# Altium PCB PCB1.PcbDoc (part 1 of 2)
Units mm, origin at the board's own origin, x right, y up, seen from the top; angles counter-clockwise.
Board outline 52.81 x 140.21 mm, 4 copper layers (Top Layer, Int1 (GND), Int2 (PWR), Bottom Layer), stack 1.566 mm thick; 98 components, 47 nets, 264 pads, 608 vias.
Unrouted connection lines stored in the file: 7.
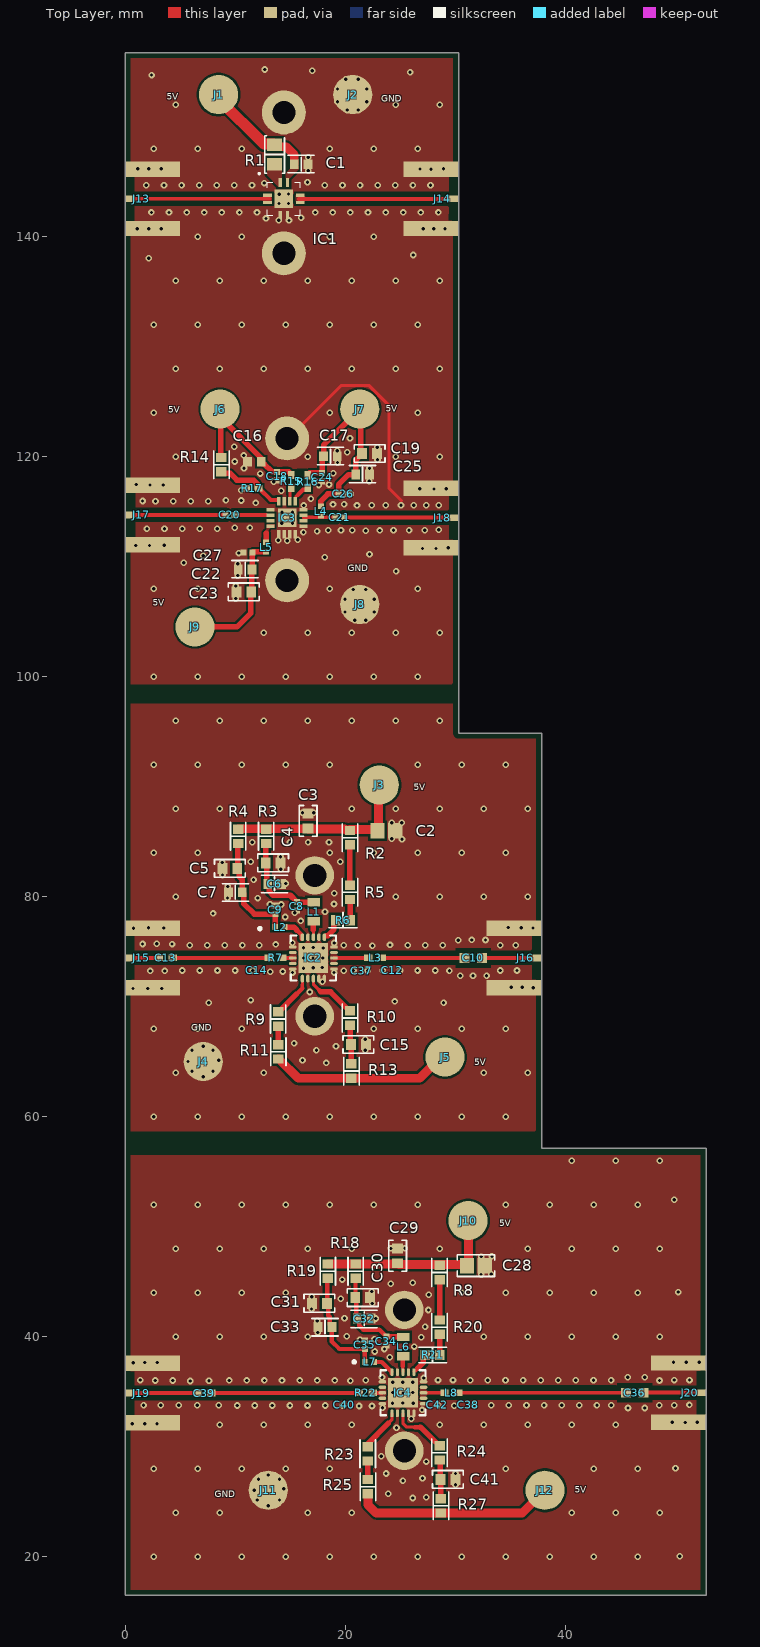
[diagram p0: Top Layer view]
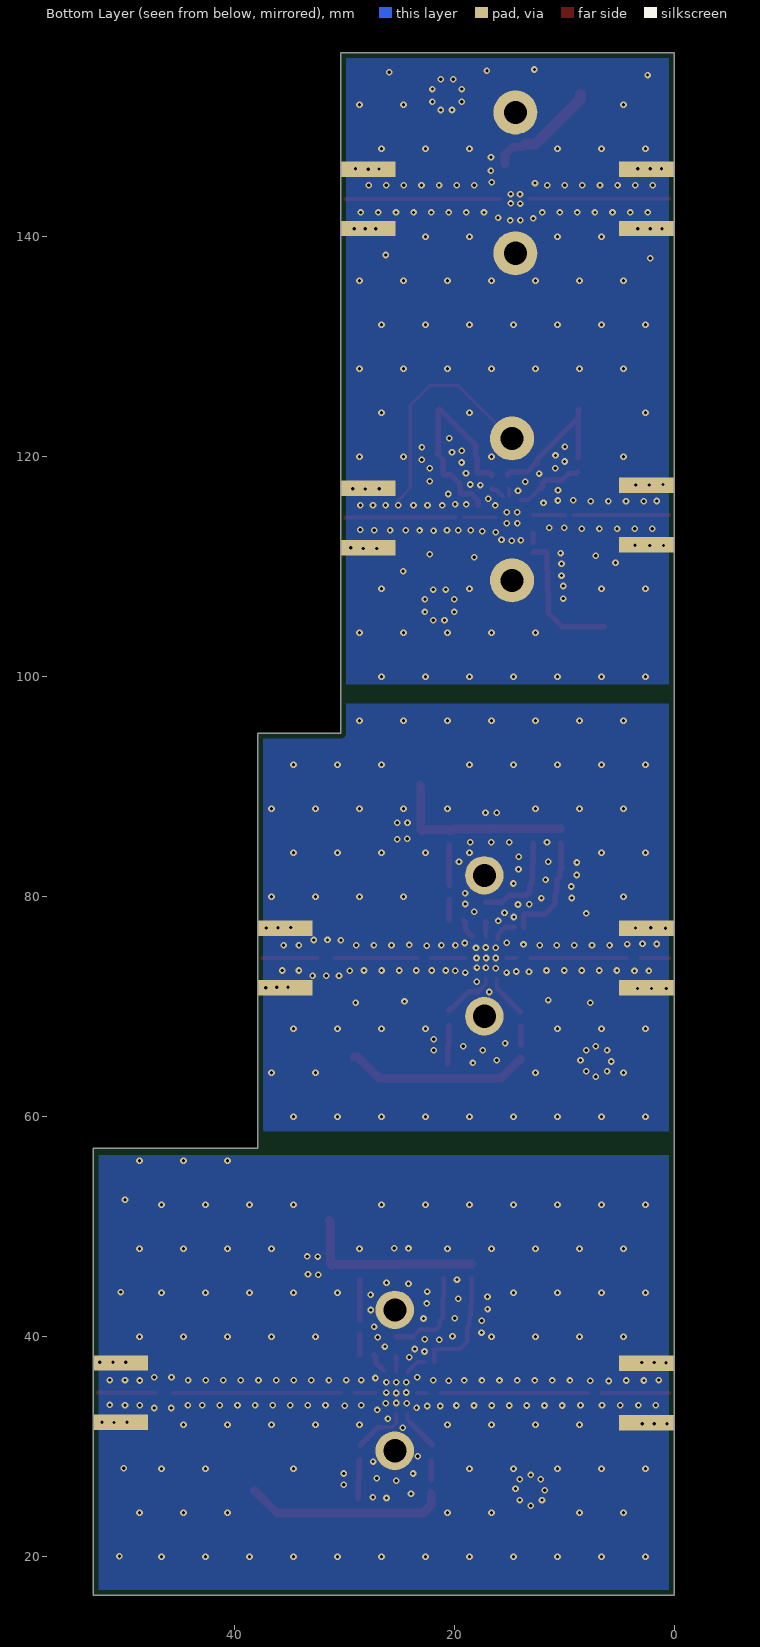
[diagram p1: Bottom Layer view, seen from below]
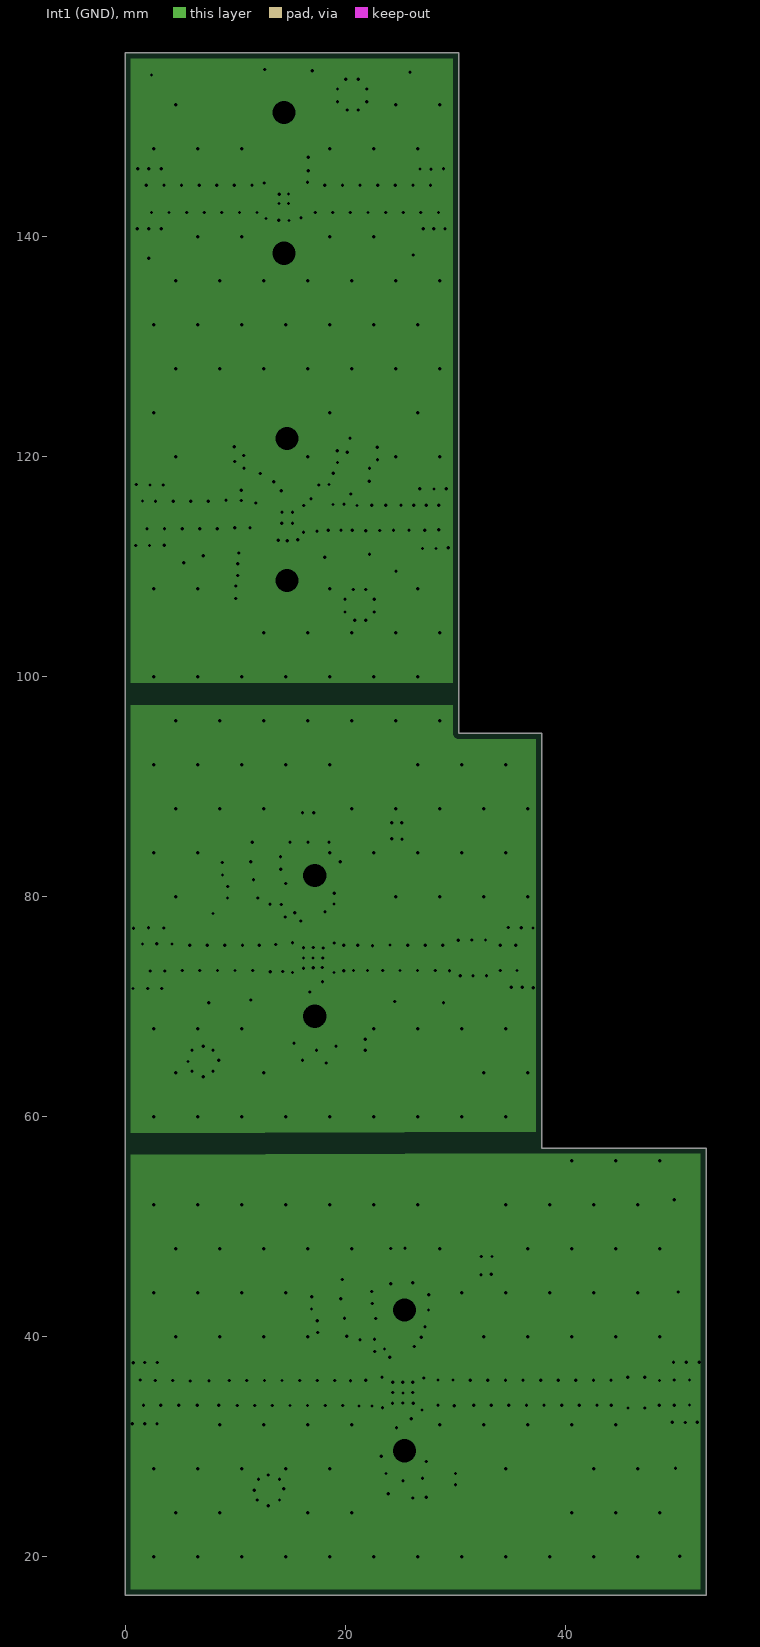
[diagram p2: Int1 (GND), clearances drawn from the general rule]
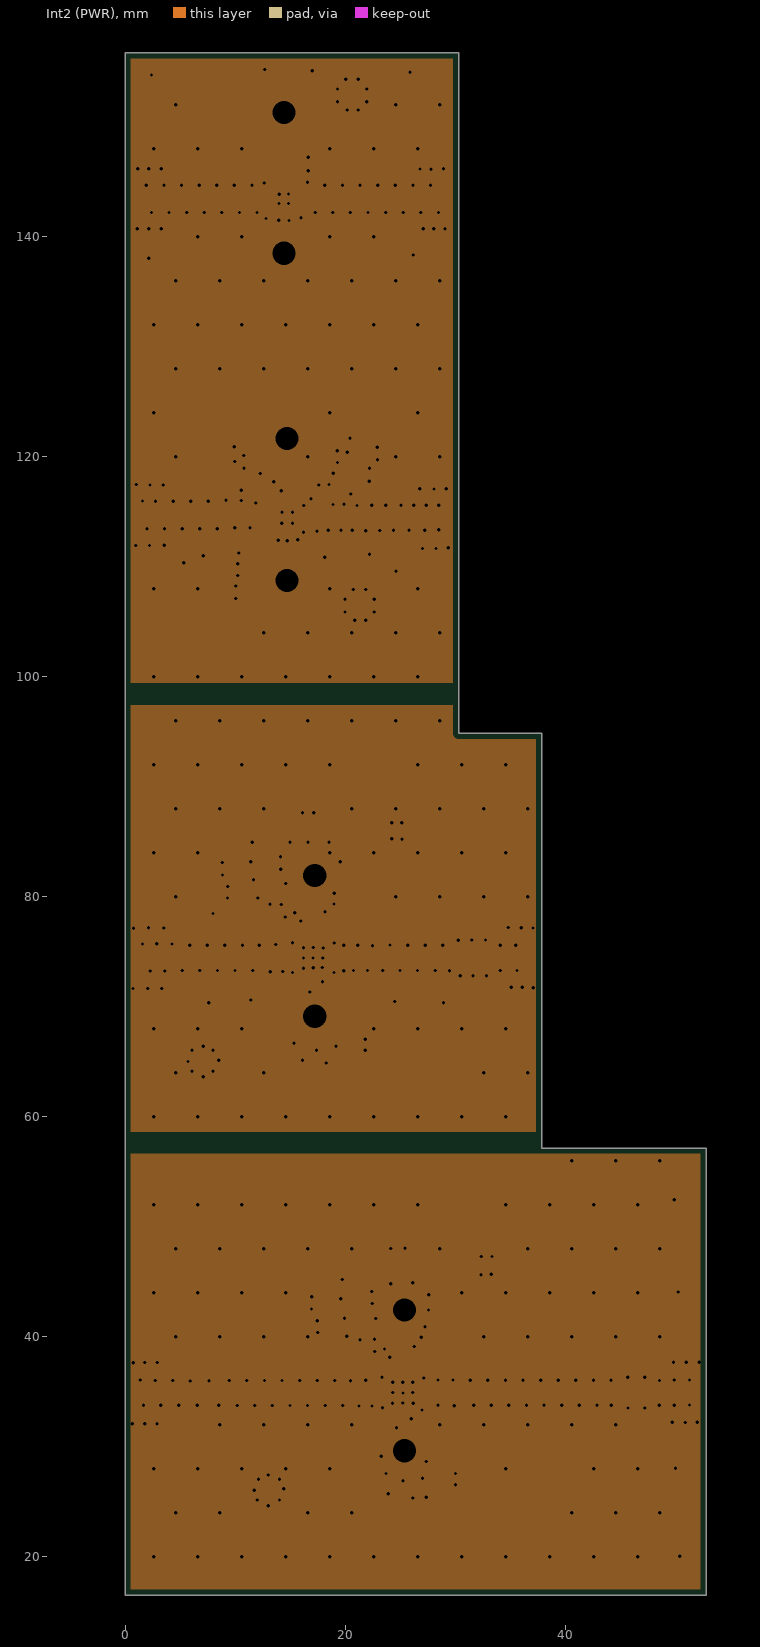
[diagram p3: Int2 (PWR), clearances drawn from the general rule]

## Layer stack, top to bottom
Top Solder: solder mask 0.0254, SM-001, Dk 4
Top Layer: signal copper 0.035
Dielectric 1: prepreg 0.203, PP-023, Dk 4.4
Int1 (GND): plane copper 0.03, net GND
Dielectric 3: core 1.03, Core-024, Dk 4.6
Int2 (PWR): plane copper 0.03, net GND
Dielectric 5: prepreg 0.203, PP-023, Dk 4.4
Bottom Layer: signal copper 0.035
Bottom Solder: solder mask 0.0254, SM-001, Dk 4

## Board outline
0,16.51 0,156.718 30.314,156.718 30.314,94.869 37.863,94.869 37.863,57.151 37.863,57.152 52.812,57.152 52.812,16.51

## Design rules (kind name [scope] priority, off if disabled: settings)
Clearance "Min Clearence_CPWG2" [InNet('GND') vs InNetClass('CPWG_2')] p1: gap=0.15 ignorepadtopadclearanceinfootprint=FALSE except(0.38: Arc-Fill Arc-Poly Arc-Region Track-Fill Track-Poly Track-Region)
Clearance "Minimum Clearence CPWG" [InNetClass('CPWG') vs InNet('GND')] p2: gap=0.2 ignorepadtopadclearanceinfootprint=FALSE except(0.5: Arc-Fill Arc-Poly Arc-Region Track-Fill Track-Poly Track-Region)
Clearance [All] p3: gap=0.2 ignorepadtopadclearanceinfootprint=FALSE except(0: Arc-Hole Track-Hole SMDPad-Hole THPad-Hole Via-Hole Fill-Hole Poly-Hole Region-Hole Text-Hole; 0.127: SMDPad-SMDPad; 0.254: Arc-Arc Arc-Track Arc-THPad Arc-Via Arc-Text Track-Track Track-THPad Track-Via Track-Text SMDPad-THPad SMDPad-Via SMDPad-Text THPad-Via THPad-Text Via-Via Via-Text Fill-Text Poly-Text Region-Text Text-Text; 0.5: THPad-THPad)
HoleSize [All] p1: absolutevalues=TRUE maxlimit=6.3 minlimit=0.15 maxpercent=80.000 minpercent=20.000
HoleToHoleClearance [All] p1: gap=0.5 allowstackedmicrovias=TRUE
MinimumSolderMaskSliver [All] p1: minsoldermaskwidth=0.1
PlaneClearance [All] p1: clearance=0.508
PlaneConnect [All] p1: planeconnectstyle=Direct reliefexpansion=0.508 reliefentries=4 reliefconductorwidth=0.254 reliefairgap=0.254
PolygonConnect [All] p1: connectstyle=Direct reliefconductorwidth=0.254 reliefentries=4 polygonreliefangle="90 Angle" airgapwidth=0.254
RoutingVias [All] p1: holewidth=0.3 width=0.6 viastyle="Through Hole" minholewidth=0.15 minwidth=0.25 maxholewidth=6.3 maxwidth=7
SilkToSolderMaskClearance [IsPad] p1: minsilkscreentomaskgap=0.15 clearancetoexposedcopper=TRUE
SolderMaskExpansion [All] p1: expansion=0.102 istentingtop=FALSE
Width CPWG_2 [InNetClass('CPWG_2')] p1: maxlimit=0.358 minlimit=0.358 preferedwidth=0.358 impedanceprofiledriven=TRUE impedanceprofileid={64A63989-DDA5-4355-8757-AC947321AC09} impedanceprofilevalue=50.000000 minimp=50.000000 maximp=50.000000 favimp=50.000000
Width CPWG [InNetClass('CPWG')] p2: maxlimit=0.358 minlimit=0.358 preferedwidth=0.358 impedanceprofiledriven=TRUE impedanceprofileid={64A63989-DDA5-4355-8757-AC947321AC09} impedanceprofilevalue=50.000000 minimp=50.000000 maximp=50.000000 favimp=50.000000
Width [All] p3: maxlimit=2 minlimit=0.2 preferedwidth=0.3 minimp=50.000000 maximp=50.000000 favimp=50.000000
24 further rules are at their usual default settings.

## Classes and differential pairs
net class CPWG: NetC20_1 NetC20_2 NetC21_1 NetC21_2 NetIC1_1 NetIC1_5
net class CPWG_2: NetC10_1 NetC10_2 NetC11_2 NetC13_1 NetC13_2 NetC36_1 NetC36_2 NetC37_2 NetC39_1 NetC39_2 NetIC2_2 NetIC4_2
component class TQP9111_Sparam_opt: C2 C3 C4 C5 C6 C7 C8 C9 C10 C11 C12 C13 C14 C15 IC2 J3 J4 J5 L1 L2 L3 R2 R3 R4 R5 R6 R7 R10 R11 R13
component class TQP9111_Devboard_opt: C28 C29 C30 C31 C32 C33 C34 C35 C36 C38 C39 C40 C41 IC4 J10 J11 J12 L6 L7 L8 R8 R18 R19 R20 R21 R22 R23 R24 R25 R27
component class QPA9120: C16 C17 C18 C19 C20 C21 C22 C23 C24 C25 C26 C27 IC3 J6 J7 J8 J9 L4 L5 R14 R15 R16 R17
component class MNA6A: C1 IC1 J1 J2 R1

## Components (designator, comment, footprint, x,y, rotation, side; value= is the part's Value field where it differs from the comment)
C1 "1n" "CAP 0603_1608 RF" 16.003,146.581 r0 top value=1000pF
C2 "10u" "CAP 0805_2012"#1 23.75,86.002 r180 top value="10 µF"
C3 "100n" "CAP 0603_1608" 16.638,86.891 r270 top
C4 "100n" "CAP 0603_1608" 13.463,83.081 r180 top
C5 "100n" "CAP 0603_1608" 9.526,82.573 r180 top
C6 "100p" "CAP 0603_1608 RF" 13.59,81.176 r180 top value="100 pF"
C7 "100p" "CAP 0603_1608 RF" 10.034,80.414 r180 top value="100 pF"
C8 "4p7" "CAP 0402_1005 RF"#1 15.622,79.144 r90 top value="4.7 pF"
C9 "4p7" "CAP 0402_1005 RF"#1 13.665,78.81 r90 top value="4.7 pF"
C10 "100p" 0603_SPECIAL 30.844,74.44 r0 top value="100 pF"
C12 "1p5" 0402_special 24.309,73.34 r90 top value="1.5 pF"
C13 "4p7" 0402_SPECIAL_3 3.078,74.44 r0 top value="4.7 pF"
C14 "2p7" 0402_special 11.968,73.34 r90 top
C15 "100n" "CAP 0603_1608" 21.21,66.571 r0 top
C16 "100p" "CAP 0603_1608 RF" 11.752,119.544 r0 top value="100 pF"
C17 "100p" "CAP 0603_1608 RF" 18.67,120.038 r0 top value="100 pF"
C18 "4p7" "CAP 0402_1005 RF"#1 13.826,118.238 r90 top value="4.7 pF"
C19 "1u" "CAP 0603_1608" 22.226,120.292 r0 top
C20 "18p" "CAP 0402_1005 RF"#2 9.526,114.704 r0 top value="18 pF"
C21 "18p" "CAP 0402_1005 RF"#2 19.501,114.493 r0 top value="18 pF"
C22 "100p" "CAP 0603_1608 RF" 10.923,109.751 r0 top value="100 pF"
C23 "1u" "CAP 0603_1608" 10.796,107.719 r0 top
C24 "4p7" "CAP 0402_1005 RF"#1 17.908,118.133 r270 top value="4.7 pF"
C25 "100p" "CAP 0603_1608 RF" 21.591,118.387 r0 top value="100 pF"
C26 "4p7" "CAP 0402_1005 RF"#2 19.813,116.609 r0 top value="4.7 pF"
C27 "4p7" "CAP 0402_1005 RF"#1 11.177,111.275 r0 top value="4.7 pF"
C28 "10u" "CAP 0805_2012"#2 31.891,46.479 r180 top value="10 µF"
C29 "100n" "CAP 0603_1608" 24.779,47.368 r270 top
C30 "100n" "CAP 0603_1608" 21.604,43.558 r180 top
C31 "100n" "CAP 0603_1608" 17.667,43.05 r180 top
C32 "100p" "CAP 0603_1608 RF" 21.731,41.653 r180 top value="100 pF"
C33 "100p" "CAP 0603_1608 RF" 18.175,40.891 r180 top value="100 pF"
C34 "4p7" "CAP 0402_1005 RF"#1 23.763,39.621 r90 top value="4.7 pF"
C35 "4p7" "CAP 0402_1005 RF"#1 21.805,39.287 r90 top value="4.7 pF"
C36 "100p" 0603_SPECIAL 45.543,34.917 r0 top value="100 pF"
C37 "1p5" 0402_special 21.532,73.297 r90 top value="1.5 pF" (schematic designator C12)
C38 "1p6" 0402_special 31.193,33.817 r90 top value="1.6 pF"
C39 "4p7" 0402_SPECIAL_3 6.594,34.892 r0 top value="4.7 pF"
C40 "2p2" 0402_special 19.916,33.807 r90 top value="2.2 pF"
C41 "100n" "CAP 0603_1608" 29.351,27.048 r0 top
C42 "1p6" 0402_special 28.376,33.817 r90 top value="1.6 pF" (schematic designator C38)
IC1 "MNA-6A+" MNA6A 14.434,143.44 r0 top
IC2 "TQP9111" FP-TQP9111-MFG 17.12,74.44 r0 top
IC3 "QPA9120" QFN50P300X300X86-17N-D 14.733,114.44 r0 top
IC4 "TQP9111" FP-TQP9111-MFG 25.261,34.917 r0 top
J1 "Nail_Head" Nail_Head#1 23.242,154.963 r0 top
J2 "Nail_Head" Nail_Head#2 6.859,155.09 r0 top
J3 "Nail_Head" Nail_Head#3 23.114,90.17 r0 top
J4 "Nail_Head" Nail_Head#3 7.112,65.024 r0 top
J5 "Nail_Head" Nail_Head#3 29.084,65.428 r0 top
J6 "Nail_Head" Nail_Head#3 8.636,124.333 r0 top
J7 "Nail_Head" Nail_Head#4 21.336,124.206 r0 top
J8 "Nail_Head" Nail_Head#3 21.336,106.567 r0 top
J9 "Nail_Head" Nail_Head#3 6.35,104.521 r0 top
J10 "Nail_Head" Nail_Head#3 31.184,50.564 r0 top
J11 "Nail_Head" Nail_Head#4 13.023,25.926 r0 top
J12 "Nail_Head" Nail_Head#3 38.169,26.053 r0 top
J13 "60312202114513" 60312202114513 -5.55,143.44 r270 top
J14 "60312202114513" 60312202114513 35.864,143.44 r90 top
J15 "60312202114513" 60312202114513 -5.55,74.44 r270 top
J16 "60312202114513" 60312202114513 43.413,74.44 r90 top
J17 "60312202114513" 60312202114513 -5.55,114.704 r270 top
J18 "60312202114513" 60312202114513 35.864,114.44 r90 top
J19 "60312202114513" 60312202114513 -5.55,34.892 r270 top
J20 "60312202114513" 60312202114513 58.374,34.925 r90 top
L1 "10n" "IND 0603_1608 RF WW"#1 17.146,78.636 r90 top value=10nH
L2 "6n8" "IND 0402_1005 RF WW" 14.098,77.239 r180 top value="6.8 nH"
L3 "1 nH" 0402 22.104,74.44 r0 top
L4 "18n" "IND 0402_1005 RF WW" 17.808,115.044 r90 top value="18 nH"
L5 "2n2" "IND 0402_1005 RF WW" 12.828,111.783 r90 top value="2.2 nH"
L6 "10n" "IND 0603_1608 RF WW"#2 25.287,39.113 r90 top value=10nH
L7 "6n8" "IND 0402_1005 RF WW" 22.239,37.716 r180 top value="6.8 nH"
L8 "1 nH" 0402 29.042,34.917 r0 top
R1 "33R2" "RES 0805_2012" 13.59,147.47 r90 top
R2 "0R" "RES 0603_1608"#1 20.448,85.367 r90 top
R3 "0R" "RES 0603_1608"#1 12.828,85.494 r90 top
R4 "0R" "RES 0603_1608"#1 10.288,85.494 r90 top
R5 "220R" "RES 0603_1608"#1 20.448,80.399 r270 top
R6 "0R" "RES 0603_1608"#2 19.813,77.874 r0 top
R7 "0R" 0402_Special_2 13.071,74.44 r0 top value="0 Ohms"
R8 "0R" "RES 0603_1608"#1 28.589,45.844 r90 top
R9 "0R" "RES 0603_1608"#1 13.923,68.887 r90 top
R10 "0R" "RES 0603_1608"#1 20.448,68.984 r90 top
R11 "0R" "RES 0603_1608"#1 13.934,65.906 r90 top
R13 "110R" "RES 0603_1608"#1 20.575,64.158 r90 top
R14 "0R" "RES 0603_1608"#1 8.764,119.276 r90 top
R15 "5K62" "RES 0402_1005" 15.114,117.752 r90 top
R16 "1K6" "RES 0402_1005" 16.597,117.742 r90 top
R17 "100K" "RES 0402_1005" 11.558,117.117 r0 top
R18 "0R" "RES 0603_1608"#1 20.969,45.971 r90 top
R19 "0R" "RES 0603_1608"#1 18.429,45.971 r90 top
R20 "220R" "RES 0603_1608"#1 28.589,40.876 r270 top
R21 "0R" "RES 0603_1608"#1 27.954,38.351 r0 top
R22 "1R2" 0402_Special_2 21.257,34.907 r0 top
R23 "0R" "RES 0603_1608"#1 22.064,29.364 r90 top
R24 "0R" "RES 0603_1608"#1 28.589,29.461 r90 top
R25 "0R" "RES 0603_1608"#1 22.074,26.383 r90 top
R27 "110R" "RES 0603_1608"#1 28.716,24.635 r90 top

## Footprints (in the part's own frame and the unit in brackets; to place one, negate y for a bottom-side part, rotate by r counter-clockwise, add the part's x,y. Pads: shape width x height; smd on the part's side, far side on the other; paste and mask are expansions set on the pad)
0402 [mm]
  rect 0.75x0.6 smd: 1(0,0) 2(1.25,0)
  body extent 0.04,-0.32 1.23,0.32, height 0.65
0402_special [mm]
  body extent 0.12,-0.25 1.12,0.25, height 0.5
0402_Special_2 [mm]
  rect 0.75x0.6 smd: 1(0,0) 2(1.25,0)
  body extent 0.13,-0.24 1.13,0.26, height 0.35
0402_SPECIAL_3 [mm]
  rect 0.75x0.6 smd: 1(0,0) 2(1.25,0)
  body extent 0.13,-0.25 1.13,0.25, height 0.5
0603_SPECIAL [mm]
  rect 0.9x0.9 smd: 1(0,0) 2(1.6,0)
  body extent -0.03,-0.42 1.61,0.41, height 0.95
60312202114513 [mm] "SMA PCB End Launch Jack Flat Tab  6.35SQ Flange for 1.6mm PCB"
  rect 0.61x0.9 smd: 1(0,6)
  rect 1.4x5 smd: 2(-2.7,8.05) 3(2.7,8.05)
  rect 1.4x5 smd far side: 4(-2.7,8.05) 5(2.7,8.05)
  body extent -3.17,-3.95 3.17,10.25, height 3.34
"CAP 0402_1005 RF"#1 [mm] "Chip Capacitor, 2-Leads, Body 1.02x0.51mm, IPC High Density"
  rect 0.55x0.54 smd mask+0.06: 1(-0.39,0) 2(0.39,0)
  body extent -0.5,-0.26 0.5,0.26, height 0.52
"CAP 0402_1005 RF"#2 [mm] "Chip Capacitor, 2-Leads, Body 1.02x0.51mm, IPC High Density"
  rect 0.55x0.54 smd: 1(-0.39,0) 2(0.39,0)
  body extent -0.5,-0.26 0.5,0.26, height 0.52
"CAP 0603_1608" [mm] "Chip Capacitor, 2-Leads, Body 1.60x0.80mm, IPC Medium Density"
  rect 0.9x1 smd: 1(-0.675,0) 2(0.675,0)
  silkscreen extent -1.4,-0.81 1.4,0.81, body extent -0.8,-0.41 0.8,0.41, height 0.82
"CAP 0603_1608 RF" [mm] "Chip Capacitor, 2-Leads, Body 1.60x0.80mm, IPC High Density"
  rect 0.8x0.9 smd: 1(-0.625,0) 2(0.625,0)
  silkscreen extent -1.2,-0.77 1.2,0.81, body extent -0.8,-0.41 0.8,0.41, height 0.82
"CAP 0805_2012"#1 [mm] "Chip Capacitor, 2-Leads, Body 2.00x1.20mm, IPC Medium Density"
  rect 1.3x1.4 smd: 1(-0.8,0)
  rect 1.3x1.4 smd mask+0.08: 2(0.8,0)
  body extent -1,-0.64 1,0.64, height 1.26
"CAP 0805_2012"#2 [mm] "Chip Capacitor, 2-Leads, Body 2.00x1.20mm, IPC Medium Density"
  rect 1.3x1.4 smd mask+0.08: 1(-0.8,0) 2(0.8,0)
  silkscreen extent -1.7,-0.98 1.7,0.99, body extent -1,-0.64 1,0.64, height 1.26
FP-TQP9111-MFG [mm]
  rrect100% 0.7x0.305 smd paste+0 mask+0: 1(-1.875,1) 2(-1.875,0.5) 3(-1.875,0) 4(-1.875,-0.5) 5(-1.875,-1) 11(1.875,-1) 12(1.875,-0.5) 13(1.875,0) 14(1.875,0.5) 15(1.875,1)
  rrect100% 0.305x0.7 smd paste+0 mask+0: 6(-1,-1.875) 7(-0.5,-1.875) 8(0,-1.875) 9(0.5,-1.875) 10(1,-1.875) 16(1,1.875) 17(0.5,1.875) 18(0,1.875) 19(-0.5,1.875) 20(-1,1.875)
  rect 2.7x2.7 smd paste+0 mask+0: 21(0,0)
  silkscreen extent -4.98,-2.05 2.05,2.79, body extent -2.32,-2.32 2.32,2.32, height 0.25
"IND 0402_1005 RF WW" [mm] "Chip Inductor, 2-Leads, Body 1.00x0.50mm, IPC High Density"
  rect 0.48x0.54 smd: 1(-0.44,0) 2(0.44,0)
  body extent -0.5,-0.29 0.5,0.29, height 0.51
"IND 0603_1608 RF WW"#1 [mm] "Chip Inductor, 2-Leads, Body 1.65x0.99mm, IPC Medium Density"
  rect 0.76x1.13 smd mask+0.08: 1(-0.875,0) 2(0.875,0)
  body extent -0.84,-0.58 0.83,0.58, height 1
"IND 0603_1608 RF WW"#2 [mm] "Chip Inductor, 2-Leads, Body 1.65x0.99mm, IPC Medium Density"
  rect 0.76x1.13 smd: 1(-0.875,0)
  rect 0.76x1.13 smd paste+0 mask+0.08: 2(0.875,0)
  body extent -0.84,-0.58 0.83,0.58, height 1
MNA6A [mm]
  rect 0.79x0.3 smd: 1(-1.485,0.33) 2(-1.485,-0.33) 5(1.485,-0.33) 6(1.485,0.33)
  rect 0.3x0.79 smd: 3(-0.33,-1.485) 4(0.33,-1.485) 7(0.33,1.485) 8(-0.33,1.485)
  rect 1.7x1.7 smd: 9(0,0)
  silkscreen extent -2.29,-1.5 1.5,2.36, body extent -1.5,-1.5 1.5,1.5, height 1.09
Nail_Head#1 [mm]
  round 3.56 smd mask+0.254: 1(-14.733,-2.055)
Nail_Head#2 [mm]
  round 3.56 smd mask+0.254: 1(13.842,-2.182)
Nail_Head#3 [mm]
  round 3.56 smd mask+0.254: 1(0,0)
Nail_Head#4 [mm]
  round 3.56 smd mask+0.254: 1(0,0.127)
QFN50P300X300X86-17N-D [mm]
  rect 0.75x0.3 smd mask+0.051: 1(-1.5,0.75) 2(-1.5,0.25) 3(-1.5,-0.25) 4(-1.5,-0.75) 9(1.5,-0.75) 10(1.5,-0.25) 11(1.5,0.25) 12(1.5,0.75)
  rect 0.3x0.75 smd mask+0.051: 5(-0.75,-1.5) 6(-0.25,-1.5) 7(0.25,-1.5) 8(0.75,-1.5) 13(0.75,1.5) 14(0.25,1.5) 15(-0.25,1.5) 16(-0.75,1.5)
  rect 1.7x1.7 smd: 17(0,0)
  body extent -1.55,-1.55 1.55,1.55, height 0.85
"RES 0402_1005" [mm] "Chip Resistor, 2-Leads, Body 1.0x0.5mm, IPC Medium Density"
  rect 0.75x0.6 smd mask+0.06: 1(-0.575,0) 2(0.575,0)
  body extent -0.5,-0.25 0.5,0.25, height 0.35
"RES 0603_1608"#1 [mm] "Chip Resistor, 2-Leads, Body 1.60x0.80mm, IPC Medium Density"
  rect 0.85x0.95 smd: 1(-0.65,0) 2(0.65,0)
  silkscreen extent -1.27,-0.7 1.27,0.7, body extent -0.8,-0.4 0.8,0.4, height 0.45
"RES 0603_1608"#2 [mm] "Chip Resistor, 2-Leads, Body 1.60x0.80mm, IPC Medium Density"
  rect 0.85x0.95 smd mask+0.08: 1(-0.65,0)
  rect 0.85x0.95 smd: 2(0.65,0)
  silkscreen extent -1.27,-0.7 1.27,0.7, body extent -0.8,-0.4 0.8,0.4, height 0.45
"RES 0805_2012" [mm] "Chip Resistor, 2-Leads, Body 2.00x1.25mm, IPC Medium Density"
  rect 1.15x1.35 smd: 1(-0.875,0) 2(0.875,0)
  silkscreen extent -1.7,-0.9 1.7,0.9, body extent -1,-0.62 1,0.63, height 0.6

## Part data
C1: library part UMK107SD102JA-T, "CAP CER 1000PF 50V 0603", Capacitance=1000pF, Device Package="0603 (1608 Metric)", Manufacturer="Taiyo Yuden", Operating Temperature="-55°C ~ 125°C", Supplier Part Number 1=587-1069-1-ND, Tolerance=±5%, Voltage - Rated=50V, Applications="RF, Microwave, High Frequency", ComponentLink1Description=Datasheet, ComponentLink1URL=http://www.yuden.co.jp/productdata/catalog/mlcc07_e.pdf, ComponentLink2Description="DigiKey Link", ComponentLink2URL=http://digikey.com/product-detail/en/taiyo-yuden/UMK107SD102JA-T/587-1069-1-ND/930846, Features="Low Distortion", LastUpdated="02/09/2020 01:17:16", Lifecycle Status=Active, Minimum Order=1, Mounting Type="Surface Mount, MLCC", Package / Case="0603 (1608 Metric)", Packaging=TapeAndReel, Part Number=UMK107SD102JA-T, Part Status=Active, partid=885, Price=0.07, Series=CFCAP™, Size / Dimension="0.063\" L x 0.031\" W (1.60mm x 0.80mm)", Supplier 1=DigiKey, Thickness (Max)="0.035\" (0.90mm)"
C2 C28: library part GRM21BR61H106KE43L, "CAP CER 10UF 50V X5R 0805", Part Number=GRM21BR61H106KE43L
C3 C4 C5 C15 C29 C30 C31 C41: library part C0603X104K5RAC3316, "CAP CER 0603 0.1UF 50V X7R 10%", Capacitance="0.1 µF", Device Package="0603 (1608 Metric)", Manufacturer=KEMET, Operating Temperature="-55°C ~ 125°C", Ratings=AEC-Q200, Supplier Part Number 1=399-C0603X104K5RAC3316CT-ND, Temperature Coefficient=X7R, Tolerance=±10%, Voltage - Rated=50V, Applications="Automotive, Boardflex Sensitive", ComponentLink1Description=Datasheet, ComponentLink1URL=https://api.kemet.com/component-edge/download/datasheet/C0603X104K5RAC3316.pdf, ComponentLink2Description="DigiKey Link", ComponentLink2URL=https://www.digikey.com/en/products/detail/kemet/C0603X104K5RAC3316/10315788, Features="Soft Termination", LastUpdated="26/04/2023 19:06:00", Lifecycle Status=Active, Minimum Order=1, Mounting Type="Surface Mount, MLCC", Package / Case="0603 (1608 Metric)", Packaging=TapeAndReel, Part Number=C0603X104K5RAC3316, Part Status=Active, partid=11116, Price=0.02, Series="SMD Auto X7R VW80808", Size / Dimension="0.063\" L x 0.031\" W (1.60mm x 0.80mm)", Supplier 1=DigiKey, Thickness (Max)="0.037\" (0.95mm)"
C6 C7 C10 C16 C17 C22 C25 C32 C33 C36: library part 600S101GW250XT, "CAP CER 100PF 250V NP0 0603", Capacitance="100 pF", Device Package="0603 (1608 Metric)", Manufacturer="American Technical Ceramics", Operating Temperature="-55°C ~ 125°C", Supplier Part Number 1=1284-1931-1-ND, Temperature Coefficient="C0G, NP0", Tolerance=±2%, Voltage - Rated=250V, Applications="RF, Microwave, High Frequency, Bypass, Decoupling", ComponentLink1Description=Datasheet, ComponentLink1URL=http://www.atceramics.com/UserFiles/600s.pdf, ComponentLink2Description="DigiKey Link", ComponentLink2URL=https://www.digikey.com/en/products/detail/american-technical-ceramics/600S101GW250XT/3908987, Features="High Q, Low Loss, Ultra Low ESR", LastUpdated="08/02/2024 21:16:59", Lifecycle Status=Active, Minimum Order=1, Mounting Type="Surface Mount, MLCC", Package / Case="0603 (1608 Metric)", Packaging=TapeAndReel, Part Number=600S101GW250XT, Part Status=Active, partid=2165, Price=0.66, Series="ATC 600S", Size / Dimension="0.063\" L x 0.032\" W (1.60mm x 0.81mm)", Supplier 1=DigiKey, Thickness (Max)="0.035\" (0.89mm)"
C8 C9 C13 C18 C24 C26 C27 C34 C35 C39: library part 600L4R7BT200T, "CAP CER 4.7PF 200V C0G/NP0 0402", Capacitance="4.7 pF", Device Package="0402 (1005 Metric)", Manufacturer="American Technical Ceramics", Operating Temperature="-55°C ~ 125°C", Supplier Part Number 1=1284-1129-1-ND, Temperature Coefficient="C0G, NP0", Tolerance=±0.1pF, Voltage - Rated=200V, Applications="RF, Microwave, High Frequency, Bypass, Decoupling", ComponentLink1Description=Datasheet, ComponentLink1URL=http://www.atceramics.com/UserFiles/600l.pdf, ComponentLink2Description="DigiKey Link", ComponentLink2URL=https://www.digikey.com/en/products/detail/american-technical-ceramics/600L4R7BT200T/3905170, Features="High Q, Low Loss, Ultra Low ESR", LastUpdated="08/02/2024 21:11:52", Lifecycle Status=Active, Minimum Order=1, Mounting Type="Surface Mount, MLCC", Package / Case="0402 (1005 Metric)", Packaging=TapeAndReel, Part Number=600L4R7BT200T, Part Status=Active, partid=546, Price=0.28, Series="ATC 600L", Size / Dimension="0.040\" L x 0.020\" W (1.02mm x 0.51mm)", Supplier 1=DigiKey, Thickness (Max)="0.024\" (0.60mm)"
C12 C37: library part 600L1R5AW200T, "CAP CER 1.5PF 200V NP0 0402", Capacitance="1.5 pF", Device Package="0402 (1005 Metric)", Manufacturer="American Technical Ceramics", Operating Temperature="-55°C ~ 125°C", Supplier Part Number 1=478-12301-1-ND, Temperature Coefficient="C0G, NP0", Tolerance=±0.05pF, Voltage - Rated=200V, Applications="RF, Microwave, High Frequency, Bypass, Decoupling", ComponentLink1Description=Datasheet, ComponentLink1URL=http://www.atceramics.com/UserFiles/600l.pdf, ComponentLink2Description="DigiKey Link", ComponentLink2URL=https://www.digikey.com/en/products/detail/american-technical-ceramics/600L1R5AW200T/3908926, Features="High Q, Low Loss, Ultra Low ESR", LastUpdated="08/02/2024 21:11:49", Lifecycle Status=Active, Minimum Order=1, Mounting Type="Surface Mount, MLCC", Package / Case="0402 (1005 Metric)", Packaging=TapeAndReel, Part Number=600L1R5AW200T, Part Status=Active, partid=1321, Price=0.36, Series="ATC 600L", Size / Dimension="0.040\" L x 0.020\" W (1.02mm x 0.51mm)", Supplier 1=DigiKey, Thickness (Max)="0.024\" (0.60mm)"
C14: library part 600L2R7AT200T, "CAP CER 2.7PF 200V C0G/NP0 0402", Part Number=600L2R7AT200T
C19 C23: library part GCM188R71E105KA64J, "CAP CER 1UF 25V X7R 0603", Capacitance="1 µF", Device Package="0603 (1608 Metric)", Manufacturer="Murata Electronics", Operating Temperature="-55°C ~ 125°C", Ratings=AEC-Q200, Supplier Part Number 1=490-GCM188R71E105KA64JCT-ND, Temperature Coefficient=X7R, Tolerance=±10%, Voltage - Rated=25V, Applications=Automotive, ComponentLink1Description=Datasheet, ComponentLink1URL=https://www.murata.com/-/media/webrenewal/support/library/catalog/products/capacitor/ceramiccapacitor/c03e.ashx?la=en-us&cvid=20200707014404000000, ComponentLink2Description="DigiKey Link", ComponentLink2URL=https://www.digikey.com/en/products/detail/murata-electronics/GCM188R71E105KA64J/4903957, LastUpdated="09/02/2024 20:09:55", Lifecycle Status=Active, Minimum Order=1, Mounting Type="Surface Mount, MLCC", Package / Case="0603 (1608 Metric)", Packaging=TapeAndReel, Part Number=GCM188R71E105KA64J, Part Status=Active, partid=34745, Price=0.02, Series=GCM, Size / Dimension="0.063\" L x 0.031\" W (1.60mm x 0.80mm)", Supplier 1=DigiKey, Thickness (Max)="0.035\" (0.90mm)"
C20 C21: library part 600L180GT200T, "CAP CER 18PF 200V NP0 0402", Capacitance="18 pF", Device Package="0402 (1005 Metric)", Manufacturer="American Technical Ceramics", Operating Temperature="-55°C ~ 125°C", Supplier Part Number 1=1284-1910-1-ND, Temperature Coefficient="C0G, NP0", Tolerance=±2%, Voltage - Rated=200V, Applications="RF, Microwave, High Frequency, Bypass, Decoupling", ComponentLink1Description=Datasheet, ComponentLink1URL=http://www.atceramics.com/UserFiles/600l.pdf, ComponentLink2Description="DigiKey Link", ComponentLink2URL=https://www.digikey.com/en/products/detail/american-technical-ceramics/600L180GT200T/3908919, Features="High Q, Low Loss, Ultra Low ESR", LastUpdated="08/02/2024 21:11:47", Lifecycle Status=Active, Minimum Order=1, Mounting Type="Surface Mount, MLCC", Package / Case="0402 (1005 Metric)", Packaging=TapeAndReel, Part Number=600L180GT200T, Part Status=Active, partid=2016, Price=0.49, Series="ATC 600L", Size / Dimension="0.040\" L x 0.020\" W (1.02mm x 0.51mm)", Supplier 1=DigiKey, Thickness (Max)="0.024\" (0.60mm)"
C38 C42: library part 600L1R6BT200T, "CAP CER 1.6PF 200V NP0 0402", Capacitance="1.6 pF", Device Package="0402 (1005 Metric)", Manufacturer="American Technical Ceramics", Operating Temperature="-55°C ~ 125°C", Supplier Part Number 1=1284-1866-1-ND, Temperature Coefficient="C0G, NP0", Tolerance=±0.1pF, Voltage - Rated=200V, Applications="RF, Microwave, High Frequency, Bypass, Decoupling", ComponentLink1Description=Datasheet, ComponentLink1URL=http://www.atceramics.com/UserFiles/600l.pdf, ComponentLink2Description="DigiKey Link", ComponentLink2URL=https://www.digikey.com/en/products/detail/american-technical-ceramics/600L1R6BT200T/3908928, Features="High Q, Low Loss, Ultra Low ESR", LastUpdated="08/02/2024 21:11:52", Lifecycle Status=Active, Minimum Order=1, Mounting Type="Surface Mount, MLCC", Package / Case="0402 (1005 Metric)", Packaging=TapeAndReel, Part Number=600L1R6BT200T, Part Status=Active, partid=537, Price=0.39, Series="ATC 600L", Size / Dimension="0.040\" L x 0.020\" W (1.02mm x 0.51mm)", Supplier 1=DigiKey, Thickness (Max)="0.024\" (0.60mm)"
C40: library part 600L2R2BT200T, "CAP CER 2.2PF 200V C0G/NP0 0402", Capacitance="2.2 pF", Device Package="0402 (1005 Metric)", Manufacturer="American Technical Ceramics", Operating Temperature="-55°C ~ 125°C", Supplier Part Number 1=1284-1120-1-ND, Temperature Coefficient="C0G, NP0", Tolerance=±0.1pF, Voltage - Rated=200V, Applications="RF, Microwave, High Frequency, Bypass, Decoupling", ComponentLink1Description=Datasheet, ComponentLink1URL=http://www.atceramics.com/UserFiles/600l.pdf, ComponentLink2Description="DigiKey Link", ComponentLink2URL=https://www.digikey.com/en/products/detail/american-technical-ceramics/600L2R2BT200T/3905162, Features="High Q, Low Loss, Ultra Low ESR", LastUpdated="08/02/2024 21:11:48", Lifecycle Status=Active, Minimum Order=1, Mounting Type="Surface Mount, MLCC", Package / Case="0402 (1005 Metric)", Packaging=TapeAndReel, Part Number=600L2R2BT200T, Part Status=Active, partid=1591, Price=0.39, Series="ATC 600L", Size / Dimension="0.040\" L x 0.020\" W (1.02mm x 0.51mm)", Supplier 1=DigiKey, Thickness (Max)="0.024\" (0.60mm)"
IC1: "Integrated Circuit", Manufacturer_Name=Mini-Circuits, Mouser Part Number=139-MNA-6A, Supplier Part Number 1=3157-MNA-6A+CT-ND, Height=0.9916mm, Manufacturer_Part_Number=MNA-6A+, Mouser Price/Stock=https://www.mouser.co.uk/ProductDetail/Mini-Circuits/MNA-6A%2b?qs=xZ%2FP%252Ba9zWqa51VJkRRE67Q%3D%3D, Supplier 1=Digi-Key
IC2 IC4: library part CMP-231850-000007-1, "Amplifier, Power, 1.8 to 2.7 GHz, 29.8 dB, 32.5 dBm, SMT, 4 x 4 mm", RoHS Compliant=Yes
IC3: "Integrated Circuit", Manufacturer_Name=Qorvo, Mouser Part Number=N/A, Datasheet Link=https://www.qorvo.com/products/d/da006507, Height=0.855mm, Manufacturer_Part_Number=QPA9120, Mouser Price/Stock=https://www.mouser.com/Search/Refine.aspx?Keyword=N%2FA
J1 J2 J3 J4 J5 J6 J7 J8 J9 J10 J11 J12: "1460-2-00-80-00-00-03-0 Mill-Max", Supplier Part Number 1=3889056, Supplier 1=Farnell
J13 J14 J15 J16 J17 J18 J19 J20: "WR-SMA Connector, PCB End Launch Jack, 6.35SQ Flange Flat Tab 1.6mm, DC~18GHz, 50Ohm", Frequency Range=DC~18GHz, Manufacturer="Wurth Elektronik", Operating Temperature Max=165°C, Operating Temperature Min=-65°C, Category="Coaxial Connectors", Center Contact Diameter="0.51 WIDE x 0.25 THK", ComponentLink1Description="Website Link", ComponentLink1URL=https://www.we-online.com/redexpert/article/60312202114513?ad, ComponentLink2Description="Datasheet Link", ComponentLink2URL=https://www.we-online.com/redexpert/spec/60312202114513?ad, Connector Type=SMA, Gender=Jack, Impedance=50Ohm, Interface Type=MIL-STD-348, Manufacturer Part Number=60312202114513, Match Code=WR-SMA, Mount="End Launch", Orientation=Straight, Packaging=Tray
L1 L6: library part LQW18AN10NG8ZD, "FIXED IND 10NH 1.6A 52 MOHM", Current Rating (Amps)=1.6A, DC Resistance (DCR)="52mOhm Max", Device Package="0603 (1608 Metric)", Frequency - Self Resonant=4.75GHz, Inductance=10nH, Inductance Frequency - Test=100MHz, Manufacturer="Murata Electronics", Operating Temperature="-55°C ~ 125°C", Q @ Freq="38 @ 250MHz", Ratings=AEC-Q200, Supplier Part Number 1=490-15640-1-ND, Tolerance=±2%, ComponentLink1Description=Datasheet, ComponentLink1URL=https://search.murata.co.jp/Ceramy/image/img/P02/JELF243A-9133.pdf, ComponentLink2Description="DigiKey Link", ComponentLink2URL=http://digikey.com/product-detail/en/murata-electronics/LQW18AN10NG8ZD/490-15640-1-ND/6800305, Height - Seated (Max)="0.039\" (1.00mm)", LastUpdated="06/09/2020 11:05:21", Lifecycle Status=Active, Material - Core=Non-Magnetic, Minimum Order=1, Mounting Type="Surface Mount", Package / Case="0603 (1608 Metric)", Packaging=TapeAndReel, Part Number=LQW18AN10NG8ZD, Part Status=Active, partid=1478, Price=0.10, Series=LQW18, Shielding=Unshielded, Size / Dimension="0.063\" L x 0.031\" W (1.60mm x 0.80mm)", Supplier 1=DigiKey, Supplier Device Package="0603 (1608 Metric)", Type=Wirewound
L2 L7: library part AISC-0402HP-6N8J-T, "FIXED IND 6.8NH 1.4A 65 MOHM SMD", Current Rating (Amps)="1.4 A", DC Resistance (DCR)="65mOhm Max", Device Package="0402 (1005 Metric)", Frequency - Self Resonant=5.8GHz, Inductance="6.8 nH", Inductance Frequency - Test="250 MHz", Manufacturer="Abracon LLC", Operating Temperature="-40°C ~ 125°C", Q @ Freq="25 @ 250MHz", Supplier Part Number 1=535-12227-1-ND, Tolerance=±5%, ComponentLink1Description=Datasheet, ComponentLink1URL=https://abracon.com/Magnetics/inductors/AISC-0402HP.pdf, ComponentLink2Description="DigiKey Link", ComponentLink2URL=https://www.digikey.com/en/products/detail/abracon-llc/AISC-0402HP-6N8J-T/4215114, Height - Seated (Max)="0.024\" (0.60mm)", LastUpdated="26/04/2023 20:01:03", Lifecycle Status=Active, Material - Core=Ceramic, Minimum Order=1, Mounting Type="Surface Mount", Package / Case="0402 (1005 Metric)", Packaging=TapeAndReel, Part Number=AISC-0402HP-6N8J-T, Part Status=Active, partid=720, Price=0.10, Series=AISC-0402HP, Shielding=Unshielded, Size / Dimension="0.039\" L x 0.022\" W (1.00mm x 0.55mm)", Supplier 1=DigiKey, Supplier Device Package="0402 (1005 Metric)", Type="Drum Core, Wirewound"
L3 L8: library part 744765010A, "FIXED IND 1NH 1.36A 45 MOHM SMD", Current Rating (Amps)="1.36 A", DC Resistance (DCR)="45mOhm Max", Device Package="0402 (1005 Metric)", Frequency - Self Resonant=6GHz, Inductance Frequency - Test="250 MHz", Manufacturer="Würth Elektronik", Operating Temperature="-40°C ~ 125°C", Q @ Freq="13 @ 250MHz", Ratings=AEC-Q200, Supplier Part Number 1=732-1703-1-ND, Tolerance=±0.2nH, ComponentLink1Description=Datasheet, ComponentLink1URL=https://katalog.we-online.de/pbs/datasheet/744765010A.pdf, ComponentLink2Description="DigiKey Link", ComponentLink2URL=https://www.digikey.com/en/products/detail/würth-elektronik/744765010A/1994068, Height - Seated (Max)="0.024\" (0.60mm)", Inductance="1 nH", LastUpdated="11/03/2024 07:55:48", Lifecycle Status=Active, Material - Core=Ceramic, Minimum Order=1, Mounting Type="Surface Mount", Package / Case="0402 (1005 Metric)", Packaging=TapeAndReel, Part Number=744765010A, Part Status=Active, partid=685, Price=0.27, Series=WE-KI, Shielding=Unshielded, Size / Dimension="0.039\" L x 0.022\" W (1.00mm x 0.55mm)", Supplier 1=DigiKey, Supplier Device Package="0402 (1005 Metric)", Type="Drum Core, Wirewound"
L4: library part LQW15AN18NG8ZD, "FIXED IND 18NH 1.05A 0.13OHM SMD", Current Rating (Amps)="1.05 A", DC Resistance (DCR)="130mOhm Max", Device Package="0402 (1005 Metric)", Frequency - Self Resonant=5.2GHz, Inductance="18 nH", Inductance Frequency - Test="100 MHz", Manufacturer="Murata Electronics", Operating Temperature="-55°C ~ 125°C", Q @ Freq="30 @ 250MHz", Ratings=AEC-Q200, Supplier Part Number 1=490-15347-1-ND, Tolerance=±2%, ComponentLink1Description=Datasheet, ComponentLink1URL=https://search.murata.co.jp/Ceramy/image/img/P02/JELF243A-9138.pdf, ComponentLink2Description="DigiKey Link", ComponentLink2URL=https://www.digikey.com/en/products/detail/murata-electronics/LQW15AN18NG8ZD/6798772, Height - Seated (Max)="0.024\" (0.60mm)", LastUpdated="11/03/2024 07:55:40", Lifecycle Status=Active, Material - Core=Non-Magnetic, Minimum Order=1, Mounting Type="Surface Mount", Package / Case="0402 (1005 Metric)", Packaging=TapeAndReel, Part Number=LQW15AN18NG8ZD, Part Status=Active, partid=193, Price=0.07, Series=LQW15, Shielding=Unshielded, Size / Dimension="0.039\" L x 0.024\" W (1.00mm x 0.60mm)", Supplier 1=DigiKey, Supplier Device Package="0402 (1005 Metric)", Type="Drum Core, Wirewound"
L5: library part LQW15AN2N2D8ZD, "FIXED IND 2.2NH 2.53A 0.022OHM", Current Rating (Amps)="2.53 A", DC Resistance (DCR)="22mOhm Max", Device Package="0402 (1005 Metric)", Frequency - Self Resonant=15.5GHz, Inductance="2.2 nH", Inductance Frequency - Test="100 MHz", Manufacturer="Murata Electronics", Operating Temperature="-55°C ~ 125°C", Q @ Freq="30 @ 250MHz", Ratings=AEC-Q200, Supplier Part Number 1=490-15377-1-ND, Tolerance=±0.5nH, ComponentLink1Description=Datasheet, ComponentLink1URL=https://search.murata.co.jp/Ceramy/image/img/P02/JELF243A-9138.pdf, ComponentLink2Description="DigiKey Link", ComponentLink2URL=https://www.digikey.com/en/products/detail/murata-electronics/LQW15AN2N2D8ZD/6798802, Height - Seated (Max)="0.024\" (0.60mm)", LastUpdated="11/03/2024 07:55:41", Lifecycle Status=Active, Material - Core=Non-Magnetic, Minimum Order=1, Mounting Type="Surface Mount", Package / Case="0402 (1005 Metric)", Packaging=TapeAndReel, Part Number=LQW15AN2N2D8ZD, Part Status=Active, partid=45, Price=0.06, Series=LQW15, Shielding=Unshielded, Size / Dimension="0.039\" L x 0.024\" W (1.00mm x 0.60mm)", Supplier 1=DigiKey, Supplier Device Package="0402 (1005 Metric)", Type="Drum Core, Wirewound"
R1: library part RCS080533R2FKEA, "RES SMD 33.2 OHM 1% 1/2W 0805", Device Package="0805 (2012 Metric)", Manufacturer="Vishay Dale", Operating Temperature="-55°C ~ 155°C", Power (Watts)="0.5W, 1/2W", Ratings=AEC-Q200, Resistance="33.2 Ohms", Supplier Device Package=0805, Supplier Part Number 1=541-2830-1-ND, Temperature Coefficient=±100ppm/°C, Tolerance=±1%, ComponentLink1Description=Datasheet, ComponentLink1URL=http://www.vishay.com/docs/20065/rcse3.pdf, ComponentLink2Description="DigiKey Link", ComponentLink2URL=https://www.digikey.com/en/products/detail/vishay-dale/RCS080533R2FKEA/5866976, Composition="Thick Film", Features="Automotive AEC-Q200, Pulse Withstanding", Height - Seated (Max)="0.020\" (0.50mm)", LastUpdated="21/05/2023 19:41:30", Lifecycle Status=Active, Minimum Order=1, Number of Terminations=2, Package / Case="0805 (2012 Metric)", Packaging=TapeAndReel, Part Number=RCS080533R2FKEA, Part Status=Active, partid=34966, Price=0.02, Series="RCS e3", Size / Dimension="0.079\" L x 0.049\" W (2.00mm x 1.25mm)", Supplier 1=DigiKey
R2 R3 R4 R6 R8 R9 R10 R11 R14 R18 R19 R21 R23 R24 R25: library part JR0603X26E, "0603 26 AMP JUMPER", Device Package="0603 (1608 Metric)", Manufacturer=Ohmite, Operating Temperature="-55°C ~ 150°C", Power (Watts)=0.135W, Resistance="0 Ohms", Supplier Device Package=0603, Supplier Part Number 1=JR0603X26ECT-ND, Tolerance=Jumper, ComponentLink1Description=Datasheet, ComponentLink1URL=https://www.ohmite.com/assets/docs/res_jr.pdf?r=false, ComponentLink2Description="DigiKey Link", ComponentLink2URL=https://www.digikey.com/en/products/detail/ohmite/JR0603X26E/10233371, Composition="Metal Element", Height - Seated (Max)="0.022\" (0.55mm)", LastUpdated="12/04/2023 19:32:57", Lifecycle Status=Active, Minimum Order=1, Number of Terminations=2, Package / Case="0603 (1608 Metric)", Packaging=TapeAndReel, Part Number=JR0603X26E, Part Status=Active, partid=6812, Price=0.10, Series=JR, Size / Dimension="0.063\" L x 0.031\" W (1.60mm x 0.80mm)", Supplier 1=DigiKey
R5 R20: library part CPF0603B220RE1, "RES SMD 220 OHM 0.1% 1/16W 0603", Device Package="0603 (1608 Metric)", Manufacturer="TE Connectivity Passive Product", Operating Temperature="-55°C ~ 155°C", Power (Watts)="0.063W, 1/16W", Resistance="220 Ohms", Supplier Device Package=0603, Supplier Part Number 1=A103065CT-ND, Temperature Coefficient=±25ppm/°C, Tolerance=±0.1%, ComponentLink1Description=Datasheet, ComponentLink1URL=https://www.te.com/commerce/DocumentDelivery/DDEController?Action=srchrtrv&DocNm=1773200&DocType=DS&DocLang=English, ComponentLink2Description="DigiKey Link", ComponentLink2URL=https://www.digikey.com/en/products/detail/te-connectivity-passive-product/CPF0603B220RE1/2381904, Composition="Thin Film", Height - Seated (Max)="0.022\" (0.55mm)", LastUpdated="26/04/2023 19:28:28", Lifecycle Status=Active, Minimum Order=1, Number of Terminations=2, Package / Case="0603 (1608 Metric)", Packaging=TapeAndReel, Part Number=CPF0603B220RE1, Part Status=Active, partid=5753, Price=0.12, Series="CPF, Neohm", Size / Dimension="0.061\" L x 0.031\" W (1.55mm x 0.80mm)", Supplier 1=DigiKey
R7: library part JR0402X20E, "0402 20 AMP JUMPER", Part Number=JR0402X20E
R13 R27: library part RN73H1JTTD1100B25, "RES 110 OHM 0.1% 1/10W 0603", Device Package="0603 (1608 Metric)", Manufacturer="KOA Speer Electronics, Inc.", Operating Temperature="-55°C ~ 155°C", Power (Watts)="0.1W, 1/10W", Ratings=AEC-Q200, Resistance="110 Ohms", Supplier Device Package=0603, Supplier Part Number 1=2019-RN73H1JTTD1100B25CT-ND, Temperature Coefficient=±25ppm/°C, Tolerance=±0.1%, ComponentLink2Description="DigiKey Link", ComponentLink2URL=https://www.digikey.com/en/products/detail/koa-speer-electronics-inc/RN73H1JTTD1100B25/10685623, Composition="Metal Film", Features="Automotive AEC-Q200, Moisture Resistant", Height - Seated (Max)="0.022\" (0.55mm)", LastUpdated="26/04/2023 19:26:31", Lifecycle Status=Active, Minimum Order=1, Number of Terminations=2, Package / Case="0603 (1608 Metric)", Packaging=TapeAndReel, Part Number=RN73H1JTTD1100B25, Part Status=Active, partid=71509, Price=0.09, Series=RN73H, Size / Dimension="0.063\" L x 0.031\" W (1.60mm x 0.80mm)", Supplier 1=DigiKey
R15: library part CRCW04025K62FKED, "RES SMD 5.62K OHM 1% 1/16W 0402", Device Package="0402 (1005 Metric)", Manufacturer="Vishay Dale", Operating Temperature="-55°C ~ 155°C", Power (Watts)="0.063W, 1/16W", Ratings=AEC-Q200, Resistance="5.62 kOhms", Supplier Device Package=0402, Supplier Part Number 1=541-5.62KLCT-ND, Temperature Coefficient=±100ppm/°C, Tolerance=±1%, ComponentLink1Description=Datasheet, ComponentLink1URL=http://www.vishay.com/docs/20035/dcrcwe3.pdf, ComponentLink2Description="DigiKey Link", ComponentLink2URL=https://www.digikey.com/en/products/detail/vishay-dale/CRCW04025K62FKED/1178093, Composition="Thick Film", Features="Automotive AEC-Q200", Height - Seated (Max)="0.016\" (0.40mm)", LastUpdated="09/02/2024 20:29:38", Lifecycle Status=Active, Minimum Order=1, Number of Terminations=2, Package / Case="0402 (1005 Metric)", Packaging=TapeAndReel, Part Number=CRCW04025K62FKED, Part Status=Active, partid=16234, Price=0.01, Series=CRCW, Size / Dimension="0.039\" L x 0.020\" W (1.00mm x 0.50mm)", Supplier 1=DigiKey
R16: library part CR0402-FX-1601GLF, "RES SMD 1.6K OHM 1% 1/16W 0402", Device Package="0402 (1005 Metric)", Manufacturer="Bourns Inc.", Operating Temperature="-55°C ~ 155°C", Power (Watts)="0.063W, 1/16W", Resistance="1.6 kOhms", Supplier Device Package=0402, Supplier Part Number 1=CR0402-FX-1601GLFCT-ND, Temperature Coefficient=±100ppm/°C, Tolerance=±1%, ComponentLink1Description=Datasheet, ComponentLink1URL=https://www.bourns.com/docs/Product-Datasheets/CR0402.pdf, ComponentLink2Description="DigiKey Link", ComponentLink2URL=https://www.digikey.com/en/products/detail/bourns-inc/CR0402-FX-1601GLF/3783173, Composition="Thick Film", Height - Seated (Max)="0.016\" (0.40mm)", LastUpdated="09/02/2024 20:29:47", Lifecycle Status=Active, Minimum Order=1, Number of Terminations=2, Package / Case="0402 (1005 Metric)", Packaging=CutTape, Part Number=CR0402-FX-1601GLF, Part Status=Active, partid=12857, Price=0.01, Series=CR0402, Size / Dimension="0.039\" L x 0.020\" W (1.00mm x 0.50mm)", Supplier 1=DigiKey
R17: library part CRCW0402100KFKEDHP, "RES SMD 100K OHM 1% 1/5W 0402", Device Package="0402 (1005 Metric)", Manufacturer="Vishay Dale", Operating Temperature="-55°C ~ 155°C", Power (Watts)="0.2W, 1/5W", Ratings=AEC-Q200, Resistance="100 kOhms", Supplier Device Package=0402, Supplier Part Number 1=541-100KYCT-ND, Temperature Coefficient=±100ppm/°C, Tolerance=±1%, ComponentLink1Description=Datasheet, ComponentLink1URL=http://www.vishay.com/docs/20043/crcwhpe3.pdf, ComponentLink2Description="DigiKey Link", ComponentLink2URL=https://www.digikey.com/en/products/detail/vishay-dale/CRCW0402100KFKEDHP/2222540, Composition="Thick Film", Features="Automotive AEC-Q200, Pulse Withstanding", Height - Seated (Max)="0.016\" (0.40mm)", LastUpdated="09/02/2024 20:29:48", Lifecycle Status=Active, Minimum Order=1, Number of Terminations=2, Package / Case="0402 (1005 Metric)", Packaging=TapeAndReel, Part Number=CRCW0402100KFKEDHP, Part Status=Active, partid=12749, Price=0.01, Series=CRCW-HP, Size / Dimension="0.039\" L x 0.020\" W (1.00mm x 0.50mm)", Supplier 1=DigiKey
R22: library part SR731ERTTP1R20F, "RES 1.2 OHM 1% 1/6W 0402", Device Package="0402 (1005 Metric)", Manufacturer="KOA Speer Electronics, Inc.", Operating Temperature="-55°C ~ 155°C", Power (Watts)="0.167W, 1/6W", Ratings=AEC-Q200, Resistance="1.2 Ohms", Supplier Device Package=0402, Supplier Part Number 1=2019-SR731ERTTP1R20FCT-ND, Temperature Coefficient=±200ppm/°C, Tolerance=±1%, ComponentLink1Description=Datasheet, ComponentLink1URL=http://www.koaspeer.com/catimages/Products/SR73-RT/SR73-RT.pdf, ComponentLink2Description="DigiKey Link", ComponentLink2URL=https://www.digikey.com/en/products/detail/koa-speer-electronics-inc/SR731ERTTP1R20F/9916424, Composition="Thick Film", Features="Anti-Sulfur, Automotive AEC-Q200, Current Sense, Moisture Resistant", Height - Seated (Max)="0.016\" (0.40mm)", LastUpdated="09/02/2024 20:29:36", Lifecycle Status=Active, Minimum Order=1, Number of Terminations=2, Package / Case="0402 (1005 Metric)", Packaging=TapeAndReel, Part Number=SR731ERTTP1R20F, Part Status=Active, partid=16999, Price=0.12, Series=SR73-RT, Size / Dimension="0.039\" L x 0.020\" W (1.00mm x 0.50mm)", Supplier 1=DigiKey

## Free pads (board coordinates)
  round 4 hole 2.1: MH1(14.434,151.29) MH2(14.434,138.49) MH3(14.733,121.662) MH4(14.733,108.762)
  round 3.5 hole 2.1: MH5(17.247,81.94) MH6(17.247,69.14) MH7(25.387,42.447) MH8(25.387,29.647)

## Via types
v1: diameter 0.6, hole 0.3, Top Layer to Bottom Layer, 398 vias
v2: diameter 0.6, hole 0.3, Top Layer to Bottom Layer, tented both sides, 210 vias

## Nets (pads, with @x,y where several pads share a name; then routed paths per layer and width w, separated by ;. In a path a pad name is that pad's centre, name@x,y a point inside that pad or via, vN(x,y) a via of type N, cw(c..) or ccw(c..) an arc to the next point about the centre after c; other vN are vias at no path point)
5V: C1.1 C2.2 C3.2 C16.2 C17.1 C18.2 C19.1 C22.2 C23.2 C24.1 C25.1 C26.1 C27.2 C28.2 C29.2 IC1.7 J1.1 J3.1 J5.1 J6.1 J7.1 J9.1 J10.1 J12.1 L4.2 L5.1 R1.2 R2.2 R3.2 R4.2 R8.2 R11.1 R13.1 R14.2 R15.2 R16.2 R18.2 R19.2 R25.1 R27.1 | length 124.9
  Top Layer w0.5: J9.1 10.16,104.521 11.43,105.791 11.43,107.679 C23.2 11.509,107.758 11.509,109.713 C22.2 11.557,109.761 11.557,111.266 C27.2 11.572,111.275 11.64,111.343 L5.1 ; J6.1 8.7,124.269 J6.1@8.7,123.542 ; R14.2 8.7,119.99 J6.1@8.7,123.542 ; R4.2 R4.2@10.324,86.18 ; C18.2 13.826,118.633 13.806,118.653 13.341,118.653 12.65,119.344 12.527,119.344 12.437,119.434 12.437,119.806 J6.1@8.7,123.542 ; C18.2@13.834,118.62 14.897,118.62 15.114,118.402 R15.2 ; R16.2 16.597,118.392 16.647,118.442 16.722,118.442 16.803,118.523 C24.1 ; C3.2@16.602,86.18 C3.2 ; L4.2@17.808,115.582 17.801,115.589 17.801,115.972 18.438,116.609 C26.1 19.423,117.467 20.32,118.364 20.942,118.364 C25.1 20.966,119.657 21.551,120.242 C19.1 21.443,120.4 21.443,124.226 J7.1 18.045,121.042 C17.1 17.907,119.901 C24.1 ; C2.2@22.843,86.109 C2.2
  Top Layer w0.8: R4.2@10.324,86.18 12.828,86.18 C3.2@16.602,86.18 ; R1.2@13.515,148.42 R1.2 13.765,148.17 14.644,148.17 15.378,147.436 C1.1 ; R11.1 13.984,65.256 15.74,63.5 20.566,63.5 R13.1 26.79,63.508 28.71,65.428 J5.1 ; C3.2 16.688,86.166 17.072,86.166 17.082,86.156 19.975,86.156 20.089,86.042 20.423,86.042 R2.2 ; R19.2 R18.2 24.657,46.621 24.729,46.693 C29.2 24.886,46.586 30.984,46.586 C28.2 31.23,46.618 31.23,50.425 J10.1@31.369,50.564 ; R2.2@20.448,86.109 C2.2@22.843,86.109 ; R25.1 22.074,24.749 22.841,23.982 R27.1@28.713,23.982 ; C2.2 23.032,86.084 23.032,90.088 J3.1 ; R27.1 36.101,23.985 J12.1
  Top Layer w1: J1.1 8.509,152.527 12.616,148.42 R1.2@13.515,148.42
GND: C1.2 C2.1 C3.1 C4.1 C5.2 C6.1 C7.2 C8.1 C9.2 C15.2 C16.1 C17.2 C18.1 C19.2 C22.1 C23.1 C24.2 C25.2 C26.2 C27.1 C28.1 C29.1 C30.1 C31.2 C32.1 C33.2 C34.1 C35.2 C41.2 IC1.3 IC1.4 IC1.9 IC2.1 IC2.5 IC2.7 IC2.9 IC2.10 IC2.11 IC2.15 IC2.17 IC2.19 IC2.21 IC3.1 IC3.5 IC3.6 IC3.7 IC3.8 IC3.9 IC3.12 IC3.15 IC3.17 IC4.1 IC4.5 IC4.7 IC4.9 IC4.10 IC4.11 IC4.15 IC4.17 IC4.19 IC4.21 J2.1 J4.1 J8.1 J11.1 J13.2 J13.3 J13.4 J13.5 J14.2 J14.3 J14.4 J14.5 J15.2 J15.3 J15.4 J15.5 J16.2 J16.3 J16.4 J16.5 J17.2 J17.3 J17.4 J17.5 J18.2 J18.3 J18.4 J18.5 J19.2 J19.3 J19.4 J19.5 J20.2 J20.3 J20.4 J20.5 pad.MH1 pad.MH2 pad.MH3 pad.MH4 pad.MH5 pad.MH6 pad.MH7 pad.MH8 R17.1 | length 21.2
  Top Layer w0.29: pad.MH3@14.733,121.562 19.628,126.458 22.216,126.458 23.982,124.692 23.982,117.157 25.134,116.005
  other v1: 13.023,24.656 12.007,25.164 14.039,25.164 26.141,25.352 27.377,25.426 23.917,25.751 11.753,26.053 14.42,26.18 30.041,26.561 25.26,26.925 12.134,27.069 14.039,27.069 27.043,27.135 13.023,27.45 23.728,27.576 30.041,27.577 27.367,28.663 23.302,29.157 24.677,31.742 2.908,32.088 0.65,32.104 1.803,32.104 50.909,32.211 49.726,32.226 52.006,32.226 26.017,32.541 26.998,33.355 45.72,33.528 47.244,33.528 23.41,33.546 21.273,33.712 22.448,33.712 29.932,33.726 1.684,33.769 10.187,33.759 11.787,33.759 13.387,33.759 14.987,33.759 16.587,33.759 18.187,33.759 19.787,33.759 3.248,33.775 4.892,33.782 6.556,33.777 8.509,33.782 28.448,33.782 31.691,33.777 33.291,33.777 34.891,33.777 36.491,33.777 38.091,33.777 39.691,33.777 41.291,33.777 42.891,33.777 44.196,33.782 48.562,33.784 49.911,33.782 51.301,33.811 24.317,33.975 25.252,33.982 26.202,33.975 25.26,34.896 26.159,34.932 24.346,34.94 24.346,35.861 25.245,35.875 26.152,35.868 5.939,35.988 7.63,36.008 20.489,36.022 2.746,36.033 4.346,36.033 9.472,36.04 11.072,36.04 12.672,36.04 14.272,36.04 15.872,36.04 17.472,36.04 19.072,36.04 21.891,36.053 48.578,36.033 1.397,36.068 28.448,36.068 29.807,36.069 31.379,36.058 32.979,36.058 34.579,36.058 36.179,36.058 37.779,36.058 39.379,36.058 40.979,36.058 42.579,36.058 44.179,36.058 49.911,36.068 51.308,36.068 27.15,36.254 23.361,36.321 45.683,36.331 47.244,36.322 0.746,37.643 1.803,37.675 2.94,37.675 49.854,37.684 51.009,37.684 52.206,37.698 24.073,38.141 22.691,38.669 23.576,38.898 26.289,39.116 21.361,39.729 22.675,39.769 26.931,39.954 20.149,40.043 17.507,40.386 27.272,40.911 17.483,41.465 22.786,41.666 19.952,41.678 27.576,42.443 16.956,42.522 22.476,43.036 19.619,43.449 16.961,43.654 27.593,43.836 22.429,44.116 24.143,44.835 26.141,44.903 19.74,45.205 32.361,45.654 33.281,45.693 32.389,47.297 33.347,47.311 24.148,48.037 25.439,48.058 7.112,63.627 6.096,64.135 8.001,64.135 18.288,64.897 5.715,65.024 8.509,65.151 16.129,65.151 6.096,66.04 8.001,66.04 17.399,66.04 21.844,66.04 7.112,66.421 19.177,66.421 15.367,66.675 21.844,67.056 16.795,71.345 0.72,71.658 2.052,71.658 3.325,71.658 37.115,71.739 35.099,71.771 36.107,71.771 17.94,72.262 30.462,72.823 31.633,72.814 32.864,72.814 15.229,73.108 19,73.108 13.197,73.182 14.347,73.21 2.292,73.258 3.602,73.258 19.888,73.271 29.486,73.272 5.201,73.3 6.801,73.3 8.401,73.3 10.001,73.3 11.601,73.3 20.77,73.297 22.04,73.297 23.437,73.297 24.991,73.3 26.591,73.3 28.191,73.3 34.105,73.297 35.629,73.297 16.219,73.511 17.109,73.537 17.928,73.564 17.093,74.434 17.963,74.434 16.219,74.436 18.007,75.352 16.228,75.378 17.118,75.387 22.488,75.561 5.87,75.581 7.47,75.581 9.07,75.581 10.67,75.581 12.208,75.593 19.881,75.583 21.151,75.583 25.687,75.581 27.287,75.581 28.887,75.581 34.105,75.583 35.502,75.583 24.087,75.62 13.694,75.666 4.274,75.699 1.593,75.71 2.876,75.718 19.019,75.796 15.215,75.822 30.286,76.052 31.509,76.079 32.766,76.073 0.779,77.132 2.14,77.176 3.515,77.161 37.082,77.168 34.839,77.2 36.009,77.184 15.984,77.804 14.563,78.165 15.421,78.556 18.173,78.638 14.194,79.298 13.174,79.327 18.993,79.34 9.317,79.892 12.065,79.883 19.005,80.333 9.342,80.937 14.608,81.21 11.684,81.534 8.861,81.981 14.144,82.495 8.838,83.118 11.43,83.185 19.558,83.185 14.131,83.634 11.557,84.963 14.986,84.963 16.637,84.963 18.542,84.963 25.179,85.235 24.247,85.265 24.232,86.738 25.157,86.738 16.129,87.63 17.145,87.63 20.875,105.129 21.891,105.129 19.986,105.891 22.653,105.891 19.986,107.034 22.653,107.034 10.067,107.106 20.748,107.923 21.891,107.923 10.073,108.249 10.237,109.193 10.237,110.257 10.324,111.239 27.042,111.662 28.267,111.662 29.392,111.711 0.967,111.929 2.221,111.929 3.562,111.958 14.753,112.372 13.926,112.404 15.689,112.442 16.217,113.136 17.454,113.229 21.867,113.278 18.484,113.302 19.627,113.302 20.643,113.302 23.139,113.3 24.4,113.311 25.82,113.317 27.252,113.316 28.523,113.37 1.989,113.463 3.589,113.463 5.189,113.463 6.789,113.463 8.389,113.463 11.351,113.529 9.986,113.553 14.243,113.952 15.214,113.952 14.26,114.94 15.225,114.952 16.256,115.57 21.082,115.57 22.421,115.588 23.691,115.588 25.088,115.588 26.231,115.588 27.374,115.588 28.517,115.588 18.902,115.66 19.911,115.672 11.876,115.798 2.772,115.946 4.372,115.946 5.972,115.946 7.572,115.946 1.593,115.969 10.565,116.014 9.169,116.033 16.898,116.166 20.524,116.607 14.196,116.916 10.558,116.953 28.083,117.058 26.797,117.094 29.21,117.094 2.264,117.425 3.484,117.423 17.609,117.418 1.016,117.475 18.542,117.475 13.527,117.712 22.212,117.769 12.278,118.467 18.923,118.491 10.81,118.961 22.217,118.947 19.32,119.468 9.96,119.565 22.945,119.713 10.783,120.115 20.193,120.396 19.299,120.549 22.924,120.85 9.925,120.891 20.447,121.666 2.159,140.716 3.302,140.716 27.12,140.71 28.067,140.716 29.083,140.716 1.098,140.731 13.97,141.478 14.905,141.477 12.816,141.658 16.002,141.732 2.399,142.201 3.999,142.201 5.599,142.201 7.199,142.201 8.799,142.201 10.399,142.201 11.999,142.201 17.285,142.201 18.885,142.201 20.485,142.201 22.085,142.201 23.685,142.201 25.285,142.201 26.885,142.201 28.485,142.201 13.995,143.005 14.856,143.019 14.012,143.865 14.86,143.87 1.94,144.684 3.54,144.684 5.14,144.684 6.74,144.684 8.34,144.684 9.94,144.684 11.54,144.684 18.167,144.684 19.767,144.684 21.367,144.684 22.967,144.684 24.567,144.684 26.167,144.684 27.767,144.684 12.649,144.87 16.588,144.943 16.654,145.981 26.819,146.145 27.814,146.14 1.143,146.177 2.159,146.177 3.302,146.177 28.956,146.177 16.643,147.217 20.193,151.511 21.209,151.511 19.304,152.273 21.971,152.273 19.304,153.416 21.971,153.416 20.066,154.305 21.209,154.305